# Altium PCB PC110.PcbDoc (part 7 of 24)
Units mm, origin at the board's own origin, x right, y up, seen from the top; angles counter-clockwise.
Board outline 150.05 x 107.35 mm, 10 copper layers (In2.Cu, F.Cu, B.Cu, In1.Cu, In3.Cu, In4.Cu, In5.Cu, In6.Cu, In7.Cu, In8.Cu); 936 components, 1434 nets, 4891 pads, 6088 vias.
Unrouted connection lines stored in the file: 2995.
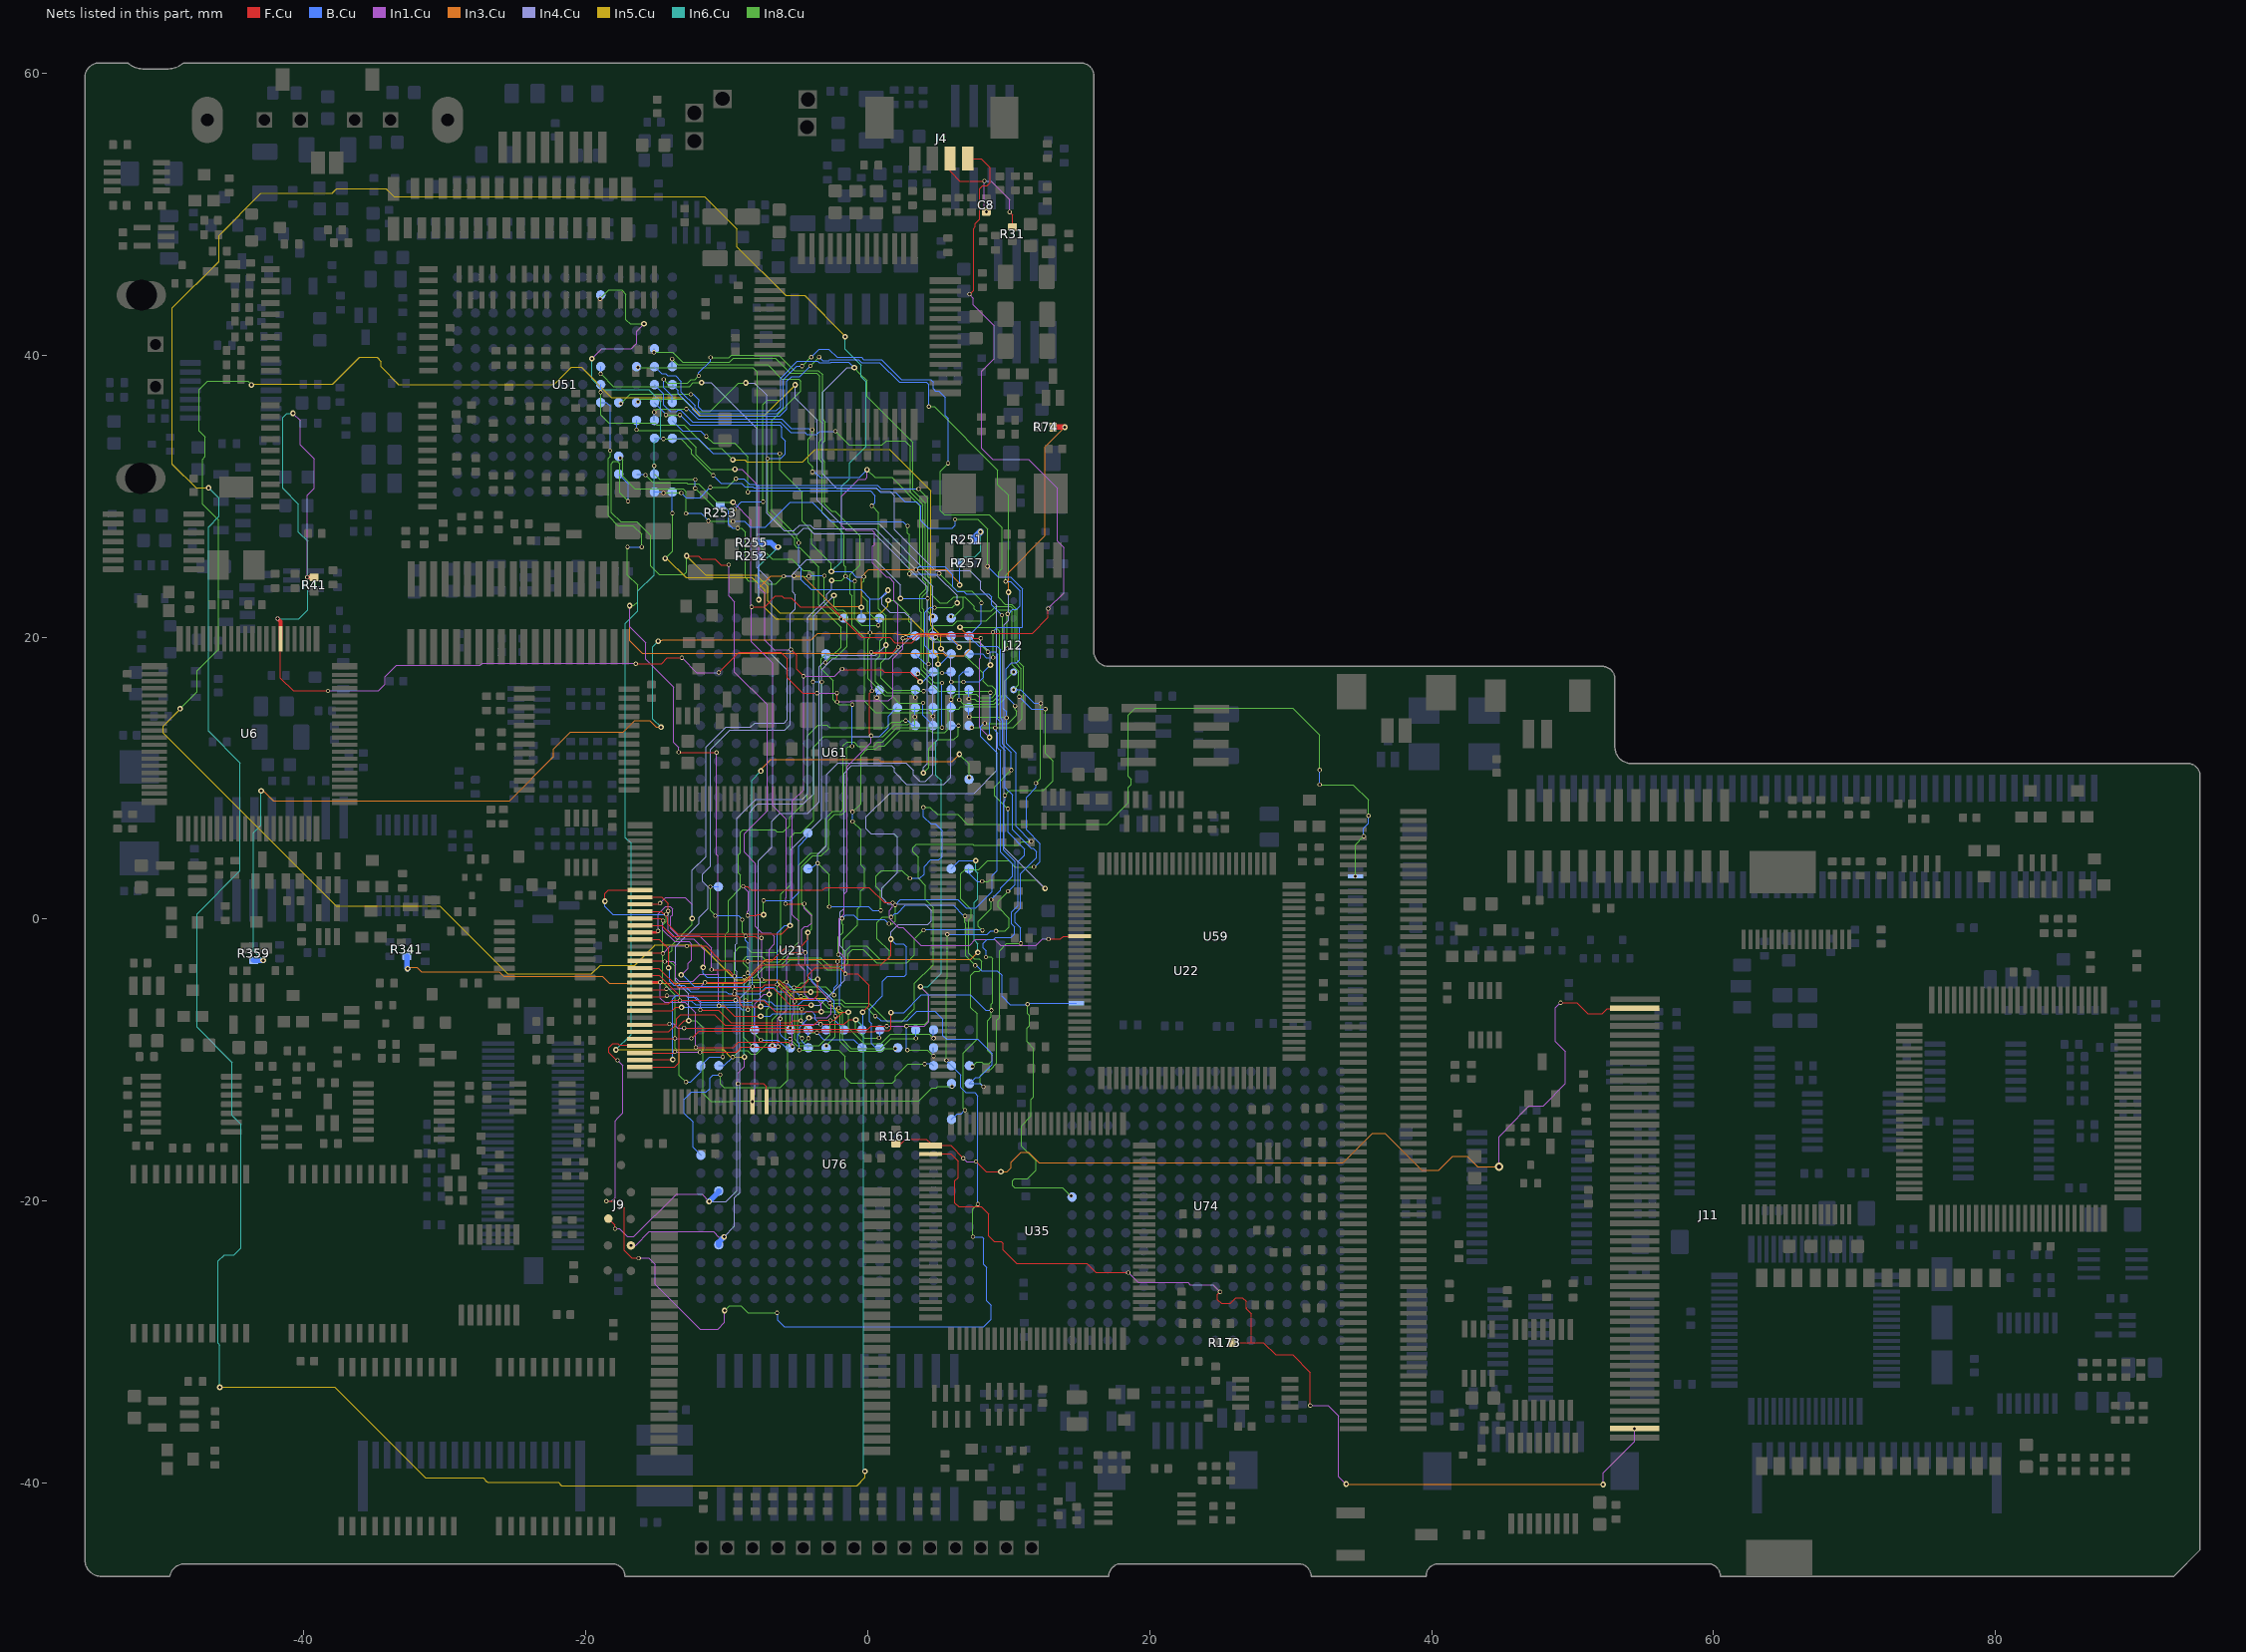
[diagram p14: the nets of this part, all layers, seen from the top]

## Via types
v1: diameter 0.3, hole 0.2, B.Cu to In8.Cu, tented both sides, 1934 vias
v2: diameter 0.4, hole 0.2, F.Cu to B.Cu, tented both sides, 1902 vias
v3: diameter 0.3, hole 0.2, F.Cu to In1.Cu, tented both sides, 1729 vias
v4: diameter 0.6, hole 0.3, F.Cu to B.Cu, tented both sides, 354 vias
v5: diameter 0.5, hole 0.3, F.Cu to B.Cu, tented both sides, 136 vias
v6: diameter 0.4, hole 0.2, B.Cu to In8.Cu, tented both sides, 12 vias
v7: diameter 0.3, hole 0.2, F.Cu to B.Cu, tented both sides, 6 vias
v8: diameter 0.6, hole 0.2, F.Cu to B.Cu, tented both sides, 4 vias
v9: diameter 0.5, hole 0.2, B.Cu to In8.Cu, tented both sides, 3 vias
v10: diameter 0.5, hole 0.2, F.Cu to B.Cu, tented both sides, 2 vias
v11: diameter 0.4, hole 0.3, F.Cu to B.Cu, tented both sides, 2 vias
v12: diameter 0.3, hole 0.2, F.Cu to In4.Cu, tented both sides, 2 vias
v13: diameter 0.6, hole 0.3, B.Cu to In8.Cu, tented both sides, 1 vias
v14: diameter 0.3, hole 0.2, F.Cu to In3.Cu, tented both sides, 1 vias

## Nets (pads, with @x,y where several pads share a name; then routed paths per layer and width w, separated by ;. In a path a pad name is that pad's centre, name@x,y a point inside that pad or via, vN(x,y) a via of type N, cw(c..) or ccw(c..) an arc to the next point about the centre after c; other vN are vias at no path point) (continued)
CF_CD1_Pluto: J11.2 R173.2 U35.27 | length 73.2
  F.Cu w0.08: U35.27@4.46,-16.65 5.89,-16.65 6.41,-17.17 6.41,-18.34 6.19,-18.56 6.19,-20.15 6.44,-20.4 8.06,-20.4 8.56,-20.9 8.56,-22.47 8.95,-22.86 9.46,-22.86 9.61,-23.01 9.61,-23.47 10.56,-24.42 15.55,-24.42 16.19,-25.06 v3(18.48,-25.06) ; v3(24.99,-26.43) 24.81,-26.61 24.81,-26.98 25.09,-27.26 25.72,-27.26 26.12,-26.86 26.59,-26.86 26.84,-27.11 26.84,-27.57 26.85,-27.58 26.85,-27.62 27.2,-27.97 27.2,-30.02 ; R173.2@25.83,-30.02 27.14,-30.02 28.05,-30.02 28.93,-30.9 30.13,-30.9 31.39,-32.16 v3(31.39,-34.49)
  In1.Cu w0.08: v3(18.48,-25.06) 19.19,-25.77 22.72,-25.77 22.87,-25.92 24.48,-25.92 v3(24.99,-26.43) ; v3(31.39,-34.49) 32.65,-34.49 33.41,-35.25 33.41,-39.53 v2(33.94,-40.06) ; v2(52.16,-40.09) 52.16,-39.28 54.39,-37.05 v3(54.39,-36.13)
  In3.Cu w0.08: v2(33.94,-40.06) 33.97,-40.09 v2(52.16,-40.09)
CF_CD2_Pluto: J11.49 R161.1 U35.26 | length 68.1
  F.Cu w0.08: R161.1@2,-15.92 2.36,-15.92 2.68,-15.6 4.15,-15.6 4.46,-15.91 U35.26@4.46,-16.05 5.88,-16.05 6.77,-16.94 v3(6.77,-16.95) ; v3(7.68,-17.19) 8.4,-17.91 v2(9.44,-17.91) ; v3(49.14,-5.92) 50.31,-5.92 51.09,-6.7 52.09,-6.7 52.46,-6.33 J11.49@54.39,-6.33
  In1.Cu w0.08: v3(6.77,-16.95) 7.01,-17.19 v3(7.68,-17.19) ; v4(44.79,-17.56) 44.79,-15.43 45.37,-14.85 45.37,-14.79 46.92,-13.24 47.92,-13.24 49.5,-11.66 49.5,-9.395 48.79,-8.685 48.79,-6.27 v3(49.14,-5.92)
  In3.Cu w0.08: v2(9.44,-17.91) 9.87,-17.91 10.16,-17.62 10.16,-17.23 10.87,-16.52 11.39,-16.52 12.15,-17.28 33.72,-17.28 35.8,-15.2 36.7,-15.2 39.3,-17.8 40.5,-17.8 41.48,-16.82 42.51,-16.82 43.25,-17.56 v4(44.79,-17.56)
Chipset_2XCPU_CLK: R359.2 U61.R2 | length 74.4
  In3.Cu w0.08: v2(-43.03,9.1) -42.87,9.1 -42.17,8.4 -25.41,8.4 -22.28,11.53 -22.28,12.07 -21.07,13.28 -17.34,13.28 -16.52,14.1 -15.47,14.1 -14.99,13.62 v2(-14.66,13.62) ; v2(-14.86,19.72) -14.81,19.77 -14.57,19.77 -14.53,19.81 -4,19.81 -3.54,20.27 1.99,20.27 2.06,20.2 5.67,20.2 6.48,19.39 v2(6.48,19.29)
  In6.Cu w0.08: v2(-43.03,9.1) -43.03,6.68 -43.58,6.13 -43.58,-2.23 v2(-42.88,-2.93) ; v2(-14.86,19.72) -15.25,19.33 -15.25,14.21 v2(-14.66,13.62)
  B.Cu w0.08: U61.R2@5.895,20.11 5.895,19.885 6.48,19.3 v2(6.48,19.29)
  B.Cu w0.4: R359.2@-43.55,-2.92 -42.89,-2.92 v2(-42.88,-2.93)
Chipset_32KHz: U21.51 U51.J2 U61.T10 | length 117.6
  F.Cu w0.08: v3(-9.2,-11.66) -7.39,-11.66 -7.18,-11.87 U21.51@-7.18,-12.94
  In1.Cu w0.08: v2(-19.56,39.76) -18.85,40.47 -16.76,40.47 -16.39,40.84 -16.39,41.71 v2(-15.87,42.23) ; v3(-9.2,-11.66) -9.2,-10.91 -8.75,-10.46 v2(-8.75,-9.77)
  In3.Cu w0.08: v2(-7.58,10.51) -7.58,10.62 -6.88,11.32 0.78,11.32 0.92,11.18 5.98,11.18 v2(6.5,11.7)
  In5.Cu w0.08: v2(-17.86,-9.26) -10.23,-9.26 -9.72,-9.77 v2(-8.75,-9.77)
  In6.Cu w0.08: v2(-19.56,39.76) -19.56,38.3 -18.83,37.57 -15.55,37.57 -14.7,36.72 -14.7,34.25 -15.15,33.8 -15.15,24.43 -16.31,23.27 -16.31,21.87 -17.19,20.99 -17.19,5.79 -16.79,5.39 -16.79,-8.173 -17.86,-9.243 v2(-17.86,-9.26) ; v2(-8.75,-9.77) -8.75,-9.56 -8.79,-9.52 -8.79,-4.61 -8.23,-4.05 -8.23,9.86 v2(-7.58,10.51)
  In8.Cu w0.08: v1(-18.99,44) -18.37,44.62 -17.45,44.62 -17.15,44.32 -17.15,42.52 -16.86,42.23 v2(-15.87,42.23) ; v2(6.5,11.7) 7.2,11 v1(7.2,10.05)
  B.Cu w0.08: v1(-18.99,44) -18.99,44.22 U51.J2@-18.94,44.27
Chipset_BIOS_CE#: U59.22 U61.G15 | length 70.8
  In8.Cu w0.08: v1(-3.55,3.98) -2.75,3.18 -2.75,0.91 v1(-2.73,0.89) ; v1(0.92,0.62) 0.92,1.98 0.58,2.32 0.58,3.07 0.96,3.45 2.44,3.45 v1(2.99,2.9) ; v1(3.95,7.93) 4.42,7.93 4.92,7.43 6.38,7.43 7.07,6.74 16.99,6.74 18.49,8.24 18.49,9.35 18.7,9.56 18.7,9.91 18.49,10.12 18.49,14.49 18.96,14.96 30.15,14.96 32.05,13.06 v1(32.05,10.58) ; v1(32.06,9.54) 34.44,9.54 35.52,8.46 v1(35.52,7.33) ; v1(34.59,3.04) 34.59,5.29 v1(35.18,5.88)
  B.Cu w0.08: U61.G15@-4.25,3.57 -4,3.57 -3.59,3.98 v1(-3.55,3.98) ; v1(-2.73,0.89) 0.07,0.89 0.34,0.62 v1(0.92,0.62) ; v1(2.99,2.9) 3.71,2.9 4,3.19 4,3.73 4.48,4.21 5.05,4.21 5.29,4.45 5.29,6.27 4.8,6.76 4.47,6.76 3.95,7.28 v1(3.95,7.93) ; v1(32.05,10.58) 32.05,9.55 v1(32.06,9.54) ; v1(35.18,5.88) 35.18,6.46 35.52,6.8 v1(35.52,7.33)
Chipset_CLK: R341.1 U61.R15 | length 51.5
  In3.Cu w0.08: v2(-32.64,-3.51) -32.55,-3.42 -31.96,-3.42 -31.66,-3.72 -26.15,-3.72 -25.83,-4.04 -18.83,-4.04 -18.34,-4.53 -8.9,-4.53 -7.22,-2.85 7.32,-2.85 v2(7.81,-2.36)
  In6.Cu w0.08: v2(7.66,4.15) 7.66,3.42 7.8,3.28 7.8,1.44 7.55,1.19 7.55,-1.48 7.81,-1.74 v2(7.81,-2.36)
  B.Cu w0.08: U61.R15@5.91,3.57 6.49,4.15 v2(7.66,4.15)
  B.Cu w0.4: R341.1@-32.69,-2.64 -32.69,-3.46 v2(-32.64,-3.51)
Chipset_CPU_CLK: R251.1 R252.1 R255.1 R257.2 U61.K1 | length 36
  In3.Cu w0.08: v2(-7.73,22.66) -7.73,23.51 -6.89,24.35 -4.61,24.35 -2.44,22.18 -0.52,22.18 v2(-0.46,22.12) -0.45,22.13 -0.45,24.28 0.06,24.79 5.55,24.79 6.52,23.82 v2(6.52,23.7)
  In6.Cu w0.08: v2(-7.73,22.66) -7.74,22.67 -7.74,25.02 v2(-6.36,26.4) ; v2(6.52,23.7) 6.52,25.31 6.89,25.68 7.57,25.68 8,26.11 v2(8,27.47)
  B.Cu w0.08: v2(-7.73,22.66) -7.71,22.68 R252.1@-7.71,25.75 ; v2(-0.46,22.12) -0.455,22.115 U61.K1@-0.455,21.38 ; v2(6.52,23.7) 6.53,23.71 R257.2@6.53,25.26 ; R251.1@7.55,26.92 R251.1@7.55,27.02
  B.Cu w0.4: R255.1@-7.71,26.72 -6.88,26.72 -6.56,26.4 v2(-6.36,26.4)
  B.Cu w0.5: R251.1@7.55,27.02 v2(8,27.47)
Chipset_CPU_CLK_Sense: R253.2 U61.J1 | length 16.2
  In8.Cu w0.08: v1(-9.22,27.74) -8.95,27.74 -8.68,27.47 -8.68,24.22 -8.45,23.99 -7.26,23.99 -7.05,23.78 -6.51,23.78 v1(-5.96,24.33) ; v1(-5.24,24.35) -5.21,24.32 v1(-4.18,24.32) ; v1(-3.08,24.36) -3.08,22.47 v1(-1.89,21.28)
  B.Cu w0.08: R253.2@-10.45,29.33 -10.23,29.33 -9.87,28.97 -9.87,28.01 -9.6,27.74 v1(-9.22,27.74) ; v1(-5.96,24.33) -5.26,24.33 v1(-5.24,24.35) ; v1(-4.18,24.32) -4.14,24.36 v1(-3.08,24.36) ; v1(-1.89,21.28) -1.825,21.28 U61.J1@-1.725,21.38
Chipset_FDC_TC: U22.33 U61.G13 | length 39
  F.Cu w0.08: v3(-8.84,2.33) -8.55,2.33 -8.27,2.05 -3.21,2.05 -3,2.26 0.1,2.26 1.19,1.17 v3(1.77,1.17) ; v3(-8.52,0.26) -7.89,0.26 -7.83,0.32 v2(-7.39,0.32) ; v3(12.82,-1.41) 13.68,-1.41 13.88,-1.21 U22.33@15.03,-1.21
  In1.Cu w0.08: v3(-8.84,2.33) -8.45,1.94 -8.45,0.63 -8.52,0.56 v3(-8.52,0.26) ; v3(1.77,1.17) 1.77,0.85 1.55,0.63 1.55,0.05 2.19,-0.59 2.5,-0.59 3.76,-1.85 7.23,-1.85 7.64,-1.44 8.99,-1.44 9.41,-1.86 11.93,-1.86 12.38,-1.41 v3(12.82,-1.41)
  In8.Cu w0.08: v2(-7.39,0.32) -7.39,1.31 v1(-7.38,1.32)
  B.Cu w0.08: v1(-7.38,1.32) -5.46,1.32 -4.9,1.88 -4.9,5.19 -4.25,5.84 U61.G13@-4.25,6.11
Chipset_SA16: U59.1 U61.B16 U74.J1 | length 62.8
  In8.Cu w0.08: v1(-11.16,2.3) -11.16,0.6 v1(-10.81,0.25) ; v1(-8.9,-0.03) -8.9,-0.94 v1(-8.66,-1.18) ; v1(-8.52,-2.99) -7.53,-2.99 -7.31,-3.21 -6.11,-3.21 -5.63,-2.73 -3.32,-2.73 -2.68,-3.37 -1.98,-3.37 -1.56,-2.95 -1.56,-2.26 -1.21,-1.91 -0.09,-1.91 0.86,-2.86 1.42,-2.86 1.54,-2.74 1.54,-2.26 0.66,-1.38 0.66,-0.23 1.04,0.15 v1(1.66,0.15) ; v1(6.89,0.23) 6.89,-0.23 6.95,-0.29 6.95,-2.61 v1(7.62,-3.28) ; v1(11.33,-6.03) 11.33,-6.7 11.46,-6.83 11.46,-7.55 11.29,-7.72 11.29,-8.68 11.77,-9.16 11.77,-12.6 11.6,-12.77 11.6,-13.94 10.9,-14.64 10.9,-16.11 11.92,-17.13 11.92,-17.82 11.32,-18.42 10.415,-18.42 10.28,-18.555 10.28,-18.9 10.41,-19.03 13.82,-19.03 v1(14.42,-19.63)
  B.Cu w0.08: v1(-11.16,2.3) U61.B16@-10.6,2.3 ; v1(-10.81,0.25) -9.18,0.25 v1(-8.9,-0.03) ; v1(-8.66,-1.18) -8.66,-1.5 -8.49,-1.67 -8.49,-2.96 v1(-8.52,-2.99) ; v1(1.66,0.15) 1.93,0.42 2.09,0.42 2.67,1 6.05,1 6.82,0.23 v1(6.89,0.23) ; v1(7.62,-3.28) 7.7,-3.28 8.08,-3.66 9.19,-3.66 9.52,-3.99 9.52,-5.47 10.1,-6.05 11.31,-6.05 v1(11.33,-6.03) 11.4,-5.96 U59.1@14.79,-5.96 ; U74.J1@14.49,-19.69 14.43,-19.63 v1(14.42,-19.63) 14.42,-19.635 U74.J1@14.495,-19.71
Chipset_Sound: R74.2 U61.T15 | length 42.8
  F.Cu w0.08: v2@13.97,34.91 v2(13.98,34.9)
  F.Cu w0.4: R74.2@13.14,34.91 v2@13.97,34.91
  In3.Cu w0.08: v2(9.98,23.19) 9.98,24.6 12.57,27.19 12.57,33.49 v2(13.98,34.9)
  In4.Cu w0.08: v2(9.98,23.19) 9.98,21.2 9.67,20.89 9.67,5.09 v2(12.58,2.18)
  In8.Cu w0.08: v1(8.12,2.68) 8.54,2.68 8.65,2.79 11.97,2.79 v2(12.58,2.18)
  B.Cu w0.08: U61.T15@7.18,3.57 7.18,3.27 7.77,2.68 v1(8.12,2.68)
CMOS_BATT+: C8.1 J4.3 R31.2 | length 10.2
  F.Cu w0.08: J4.3@5.84,53.95 5.84,53.04 6.52,52.36 v3(8.27,52.36) ; v3(10.06,50.16) 10.27,49.95 R31.2@10.27,49.1
  In1.Cu w0.08: v3(8.41,50.18) 8.27,50.32 v3(8.27,52.36) 8.74,52.36 10.06,51.04 v3(10.06,50.16)
CMOS_BATT_Sense: J4.4 R41.2 U6.6 | length 139.1
  F.Cu w0.08: U6.6@-41.65,19.88 -41.65,17.09 -40.76,16.2 v3(-38.28,16.2) ; R41.2@-39.29,24.25 R41.2@-39.27,24.23 ; v3(-16.46,18.12) -14.63,18.12 -14.21,18.54 v3(-13.18,18.54) ; v3(-10.57,17.5) -9.13,18.94 -6.18,18.94 -5.71,18.47 -5.71,17.13 -4.61,16.03 v3(-3.6,16.03) ; v3(-2.19,16.04) -2.17,16.02 v3(-2.17,15.42) ; v3(2.5,19.92) 3.14,19.92 3.51,20.29 11.7,20.29 12.8,21.39 v3(12.8,22.03) ; J4.4@7.09,53.95 8.05,53.95 8.69,53.31 8.69,52.24 8.48,52.03 8.15,52.03 7.94,51.82 7.94,49.65 7.64,49.35 7.64,49.13 7.5,48.99 7.5,44.61 v3(7.22,44.33)
  F.Cu w0.3: v7(-41.85,21.31) -41.65,21.11 U6.6@-41.65,19.88 ; v3(-39.75,24.25) R41.2@-39.29,24.25
  In1.Cu w0.08: v2(-40.77,35.88) -40.25,35.36 -40.25,33.63 -39.27,32.65 -39.27,30.56 -39.75,30.08 v3(-39.75,24.25) ; v3(-38.28,16.2) -34.71,16.2 -34.24,16.67 -34.24,17.21 -33.43,18.02 -27.48,18.02 -27.34,18.16 -16.5,18.16 v3(-16.46,18.12) ; v3(-13.18,18.54) -12.14,17.5 v3(-10.57,17.5) ; v3(-3.6,16.03) -2.2,16.03 v3(-2.19,16.04) ; v3(-2.17,15.42) -1.23,15.42 -1.16,15.49 1.48,15.49 1.79,15.8 1.79,18.46 2.5,19.17 v3(2.5,19.92) ; v3@7.22,44.32 7.49,44.05 7.49,43.56 8.975,42.075 8.975,39.765 8.09,38.88 8.09,33.38 8.85,32.62 11.4,32.62 13.46,30.56 13.46,26.81 13.91,26.36 13.91,26.03 13.915,26.025 13.915,23.155 v3@12.8,22.04
  In6.Cu w0.08: v7(-41.85,21.31) -40.34,21.31 -39.725,21.925 -39.725,26.8 -40.375,27.45 -40.375,29.425 -41.5,30.55 -41.5,35.57 -41.19,35.88 v2(-40.77,35.88)
CPU_A2: U21.10 U51.L6 U61.N7 U76.A3 | length 97.1
  F.Cu w0.08: v2(-18.64,1.27) -18.64,1.81 -18.39,2.06 U21.10@-16.153,2.06
  In8.Cu w0.08: v1(-16.3,39.13) -8.16,39.13 -7.83,38.8 -7.83,26.59 -6.77,25.53 -5.39,25.53 -4.58,24.72 -4.11,24.72 -3.85,24.46 -3.85,21.72 -3.88,21.69 -3.88,16.85 v1(-3.89,16.84) ; v1(-14.3,0.35) -14.3,-0.15 -14.55,-0.4 -14.55,-4.49 -13.65,-5.39 -13.65,-9.13 -13.37,-9.41 -13.37,-11.07 v1(-12.89,-11.55) ; v1(-10.28,-9.77) -10.28,-4.61 -10.09,-4.42 -10.09,-1.08 -9.88,-0.87 -9.88,1.34 -9.02,2.2 -9.02,3.13 -9.16,3.27 -9.16,4.57 -9.02,4.71 -9.02,6.18 -8.86,6.34 -6.58,6.34 -6.44,6.2 -5.98,6.2 -5.54,6.64 -5.54,7.22 -4.28,8.48 -4.28,13.01 -3.52,13.77 -3.27,13.77 ; v1(-3.26,16.83) -3.26,13.78 -3.27,13.77 ; v1(2.69,14.09) 2.46,14.09 2.44,14.09 2.36,14.01 2.35,14 1.84,14 1.71,14 1.54,13.83 1.29,13.58 0.95,13.58 -2.7,13.58 -2.83,13.71 -2.89,13.77 -3.27,13.77
  B.Cu w0.08: v2(-18.64,1.27) -18.64,0.9 -18.09,0.35 v1(-14.3,0.35) ; U51.L6@-16.4,39.19 -16.34,39.13 v1(-16.3,39.13) ; v1(-12.89,-11.55) -12.58,-11.55 -11.84,-10.81 U76.A3@-11.84,-10.39 -11.22,-9.77 v1(-10.28,-9.77) ; v1(-3.89,16.84) -3.27,16.84 v1(-3.26,16.83) ; v1(2.69,14.09) 2.84,14.09 3.17,13.76 U61.N7@3.355,13.76
CPU_A3: U21.11 U51.M6 U61.T7 U76.D2 | length 113.2
  F.Cu w0.08: U21.11@-16.153,1.562 -14.612,1.562 -14.16,1.11 v3(-14.16,0.58)
  In1.Cu w0.08: v3(-14.16,0.58) -14.16,-0.79 -13.54,-1.41 -12.37,-1.41 -11.57,-2.21 -11.57,-3.32 v2(-11.67,-3.42)
  In8.Cu w0.08: v1(-8.17,-9.01) -8.81,-8.37 -8.81,-6.17 -8.76,-6.12 v1(-8.76,-4.12) -8.03,-4.12 -7.3,-3.39 -5.98,-3.39 -5.49,-2.9 -3.58,-2.9 -2.88,-3.6 -1.88,-3.6 -1.38,-3.1 -1.38,-2.45 -1.06,-2.13 -0.34,-2.13 0.61,-3.08 2.78,-3.08 3.32,-2.54 3.32,-1.41 v1(3.96,-0.77) ; v1(-4.66,39.23) -4.03,39.86 v1(-4.01,39.86) ; v1(5.7,32.34) 5.14,31.78 5.14,28.96 5.42,28.68 8.6,28.68 9.52,27.76 9.52,24.88 9.27,24.63 9.27,22.81 9.74,22.34 10.22,22.34 10.61,21.95 10.61,18.35 11.05,17.91 11.05,15.43 10.96,15.34 10.96,14.22 10.32,13.58 v1(9.04,13.58) 9.03,13.59 v1(7.37,13.59) ; v1(8.13,-0.79) 7.85,-0.51 7.85,-0.15 8.75,0.75 v1(8.75,1.38)
  B.Cu w0.08: U51.M6@-15.13,39.19 -14.62,38.68 -14.32,38.68 -14.18,38.54 -13.64,38.54 -13.22,38.12 -13.22,37.4 -12.26,36.44 -12.26,36.25 -11.88,35.87 -6.41,35.87 -5.98,36.3 -5.98,38.27 -5.02,39.23 v1(-4.66,39.23) ; v2(-11.67,-3.42) -11.67,-3.85 -11.4,-4.12 v1(-8.76,-4.12) ; v1(-8.17,-9.01) -8.14,-9.01 U76.D2@-8.03,-9.12 ; v1(-4.01,39.86) -3.43,40.44 -2.765,40.44 -2.185,39.86 -0.45,39.86 -0.29,39.7 0.96,39.7 2.39,38.27 4.48,38.27 4.64,38.11 4.64,37.62 4.8,37.46 5.05,37.46 5.5,37.01 5.5,35.73 5.7,35.53 v1(5.7,32.34) ; v1(3.96,-0.77) 4.01,-0.72 8.06,-0.72 v1(8.13,-0.79) ; v1(8.75,1.38) 9.43,2.06 9.43,2.22 10.27,3.06 10.27,3.911 9.42,4.761 9.42,11.95 9.21,12.16 9.21,13.2 9.04,13.37 v1(9.04,13.58)
CPU_A4: U21.12 U51.J6 U61.R7 U76.D1 | length 106
  F.Cu w0.08: U21.12@-16.153,1.06 -14.81,1.06 v3(-14.73,1.14)
  In1.Cu w0.08: v3(-14.73,1.14) -14.34,1.53 -12.94,1.53 -12.45,1.04 v2(-12.45,0.05)
  In4.Cu w0.08: v2(-12.45,0.05) -12.45,3.47 -11.48,4.44 -11.48,12.21 -10.06,13.63 -8.31,13.63 -8.02,13.92 -5.93,13.92 -5.7,14.15 -5.7,17.65 -6.79,18.74 -6.79,23.89 -7.86,24.96 -7.86,27.31 ; v2(-11.79,38.06) -11.1,38.06 -7.86,34.82 -7.86,27.31 ; v2(3.95,10.37) 3.95,10.77 4.24,11.06 4.24,23.58 0.47,27.35 -3.85,27.35 -4.225,27.725 -4.535,27.725 -4.95,27.31 -7.86,27.31
  In8.Cu w0.08: v1(-18.94,38.69) -18.04,37.79 -12.65,37.79 -12.38,38.06 v2(-11.79,38.06) ; v1(-13.33,-5.77) -13.33,-4.93 -13.67,-4.59 -13.67,-3.35 -14.08,-2.94 -14.08,-2.4 -13.88,-2.2 -13.88,-1.81 -12.45,-0.38 v2(-12.45,0.05) ; v2(3.95,10.37) 4.35,10.77 4.35,12.11 4.97,12.73 6.12,12.73 6.43,13.04 v1(6.43,13.73)
  B.Cu w0.08: v1(-18.94,38.69) U51.J6@-18.94,39.19 ; v1(-13.33,-5.77) -12.52,-5.77 -12.22,-6.07 -8.26,-6.07 -8.03,-6.3 U76.D1@-8.03,-7.85 ; U61.R7@5.91,13.73 v1(6.43,13.73)
CPU_A5: U21.13 U51.N6 U61.P7 U76.E2 | length 97.9
  F.Cu w0.08: U21.13@-16.153,0.56 -14.65,0.56 -14.18,0.09 -14.18,-0.35 -13.5,-1.03 -6.09,-1.03 v2(-5.51,-0.45)
  In4.Cu w0.08: v2(-5.51,-0.45) -5.45,-0.39 -5.45,4.94 -3.28,7.11 -3.28,17.69 -2.495,18.475 1.235,18.475 1.24,18.47 1.51,18.47 3.09,20.05 3.09,21.29 2.61,21.77 1.56,21.77 1.02,22.31 1.02,22.81 1.43,23.22 v2(1.43,23.33)
  In8.Cu w0.08: v1(-13.87,39.73) -13.47,39.33 -7.09,39.33 -6.08,38.32 -4.91,38.32 -4.74,38.15 -4.74,37.46 -6.81,35.39 -6.81,28.98 -5.02,27.19 -5.02,27.03 -4.89,26.9 v1(-4.89,26.69) ; v1(-6.77,-8.96) -6.77,-7.12 -6.42,-6.77 v1(-6.42,-4.64) ; v1(0.16,20.32) 0.16,20.01 0.01,19.86 0.01,17.05 1.22,15.84 1.71,15.84 2.21,15.34 v1(3.92,15.34)
  B.Cu w0.08: v1(-13.87,39.73) -13.86,39.72 U51.N6@-13.86,39.19 ; v1(-6.77,-8.96) -6.77,-9.11 U76.E2@-6.76,-9.12 ; v1(-6.42,-4.64) -6.42,-0.97 -5.9,-0.45 v2(-5.51,-0.45) ; v1(-4.89,26.69) -4.89,25.05 -4.72,24.88 -4.72,24.07 -4.02,23.37 -0.48,23.37 0.17,22.72 ; v1(0.16,20.32) 0.16,22.71 0.17,22.72 ; v2(1.43,23.33) 0.82,22.72 0.17,22.72 ; v1(3.92,15.34) 3.92,14.465 U61.P7@4.625,13.76
CPU_A6: U21.14 U51.M7 U61.N6 U76.F2 | length 93.7
  F.Cu w0.08: U21.14@-16.153,0.06 -14.7,0.06 v3(-14.53,-0.11)
  In1.Cu w0.08: v3(-14.53,-0.11) -14.53,-0.76 -13.7,-1.59 -12.67,-1.59 -12.49,-1.77 -12.49,-2.89 -12.73,-3.13 -12.74,-3.13 -12.74,-3.49 -13.2,-3.95 v2(-13.24,-3.95)
  In8.Cu w0.08: v1(-8.51,-3.81) -8.51,-3.45 -8.82,-3.14 -8.82,-2.87 -8.6,-2.65 -7.52,-2.65 -7.15,-3.02 -6.28,-3.02 -4.88,-1.62 -4.88,3.85 -4.05,4.68 -3.46,4.68 -2.99,5.15 -2.99,7.15 -2.48,7.66 -1.89,7.66 -1.73,7.82 -1.73,12.31 -1.48,12.56 -0.97,12.56 -0.67,12.26 0.4,12.26 0.71,12.57 1.04,12.57 2.06,13.59 3.36,13.59 ; v1(-8.18,-4.77) -8.18,-7.96 v1(-7.58,-8.56) ; v1(-2.29,34.61) -1.31,33.63 1.02,33.63 1.33,33.94 2.63,33.94 3.02,33.55 3.02,30.29 3.91,29.4 3.91,24.07 4.12,23.86 4.12,23.42 3.69,22.99 3.69,21.82 3.8,21.71 3.8,17.69 4.73,16.76 v1(5.27,16.76) ; v1(3.35,14.36) 3.36,14.35 3.36,13.59 ; v1(5.27,13.59) 3.36,13.59
  B.Cu w0.08: U51.M7@-15.13,37.92 -14.46,37.25 -14.46,36.48 -13.99,36.01 -13.57,36.01 -13.45,36.13 -13.27,36.13 -12.41,35.27 -6.2,35.27 -5.46,34.53 -4.45,34.53 -4.31,34.39 -3.61,34.39 -3.4,34.6 -2.3,34.6 v1(-2.29,34.61) ; v2(-13.24,-3.95) -13.13,-3.95 -12.31,-4.77 v1(-8.18,-4.77) -8.18,-4.14 v1(-8.51,-3.81) ; v1(-7.58,-8.56) -6.37,-8.56 -5.81,-9.12 U76.F2@-5.49,-9.12 ; v1(3.35,14.36) 3.355,14.365 U61.N6@3.355,15.03 ; v1(5.27,13.59) v1(5.27,16.76)
CPU_A7: U21.15 U51.N7 U61.T6 U76.F1 | length 113
  F.Cu w0.08: U21.15@-16.153,-0.44 -14.61,-0.44 -13.83,-1.22 -7.97,-1.22 -7.86,-1.33 v3(-7.54,-1.33) ; v3(-7.51,-4.28) -6.29,-4.28 -5.41,-5.16 v2(-4.05,-5.16)
  In1.Cu w0.08: v3(-7.54,-1.33) -7.51,-1.36 v3(-7.51,-4.28)
  In8.Cu w0.08: v1(-5.5,-7.7) -5.5,-5.41 -5.25,-5.16 v2(-4.05,-5.16) -3.06,-5.16 -2.51,-5.71 -1.86,-5.71 -1.61,-5.96 0.08,-5.96 1.39,-7.27 2.41,-7.27 3.32,-6.36 3.32,-4.55 4.65,-3.22 4.65,0.82 4.09,1.38 4.09,2.39 3.58,2.9 3.58,4.4 3.2,4.78 3.2,5.08 3.44,5.32 7.44,5.32 7.52,5.24 7.56,5.24 7.95,5.24 10.67,5.24 10.85,5.42 10.94,5.51 v1(11.59,5.51) ; v1(-4.07,39.24) -3.45,39.86 v1(-3.45,39.87) ; v1(4.34,36.36) 4.71,36.36 9.23,31.84 9.23,30.82 9.99,30.06 9.99,24.59 9.78,24.38 v1(9.78,23.95) ; v1(7.2,14.35) 9.78,14.35 v1(9.85,14.28) ; v1(9.9,19.19) 9.9,21.64 v1(9.92,21.66)
  B.Cu w0.08: U51.N7@-13.86,37.92 -13.44,37.5 -13.44,37.27 -12.43,36.26 -12.43,36.15 -11.96,35.68 -6.23,35.68 -5.73,36.18 -5.73,38.15 -5.39,38.49 -4.82,38.49 v1(-4.07,39.24) ; v1(-3.45,39.87) -3.21,39.63 -2.75,39.63 -2.69,39.69 -0.64,39.69 -0.44,39.49 0.85,39.49 2.26,38.08 4.17,38.08 4.34,37.91 v1(4.34,36.36) ; U61.T6@7.18,15 7.18,14.37 v1(7.2,14.35) ; v1(9.78,23.95) 10.12,23.95 10.79,23.28 10.79,22.23 10.54,21.98 10.34,21.98 10.33,21.97 10.29,21.97 9.98,21.66 v1(9.92,21.66) ; v1(9.9,19.19) 9.62,18.91 9.62,14.94 9.85,14.71 v1(9.85,14.28) 9.85,12.45 10.52,11.78 10.52,6.58 v1(11.59,5.51)
CPU_A8: U21.16 U51.J7 U61.R6 U76.G2 | length 109.3
  F.Cu w0.08: v3(-11.08,-3.57) -11.05,-3.6 -9.89,-3.6 v3(-9.45,-4.04) ; v3(-9.43,-5.11) -9.41,-5.09 -7.36,-5.09 -7.18,-4.91 -6.68,-4.91 -5.5,-6.09 v2(-4.02,-6.09)
  F.Cu w0.2: U21.16@-16.153,-0.94 -14.98,-0.94 v3(-14.87,-0.83)
  In1.Cu w0.08: v3(-14.87,-0.83) -14.87,0.38 -14.35,0.9 -14.03,0.9 -13.85,0.72 -13.85,0.31 -13.98,0.18 -13.98,-0.67 -13.46,-1.19 -11.92,-1.19 -11.08,-2.03 v3(-11.08,-3.57) ; v3(-9.45,-4.04) -9.43,-4.06 v3(-9.43,-5.11)
  In4.Cu w0.08: v2(-4.02,-6.09) -3.41,-6.09 -1.64,-4.32 -1.64,-2.23 -1.96,-1.91 -1.96,0.5 -1.69,0.77 -1.69,10.33 -1.13,10.89 1.7,10.89 1.88,10.71 1.88,10.45 2.75,9.58 5.41,9.58 5.88,10.05 5.88,18.51 v2(5.2,19.19)
  In5.Cu w0.08: v2(-9.57,32.59) -8.72,32.59 -8.57,32.44 -4.61,32.44 -3.73,33.32 1.55,33.32 4.48,30.39 4.48,20.85 5.2,20.13 v2(5.2,19.19)
  In8.Cu w0.08: v1(-18.94,37.38) -18.94,35.75 -18.38,35.19 -15.09,35.19 -14.96,35.06 -13.01,35.06 -11.35,33.4 -10.38,33.4 v2(-9.57,32.59) ; v1(-4.66,-8.44) -4.67,-8.44 -4.96,-8.15 -4.96,-6.2 -4.85,-6.09 v2(-4.02,-6.09) ; v2(5.2,19.19) 5.69,18.7 6.92,18.7 8.18,17.44 8.18,16.88 8.5,16.56 8.79,16.56 9.08,16.27 9.08,15.99 8.81,15.72 7.94,15.72 7.71,15.95 6.29,15.95 v1(5.91,15.57)
  B.Cu w0.08: v1(-18.94,37.38) U51.J7@-18.94,37.92 ; v1(-4.66,-8.44) -4.66,-8.68 U76.G2@-4.22,-9.12 ; U61.R6@5.895,15.03 5.895,15.555 v1(5.91,15.57)
CPU_A9: U21.17 U51.N8 U61.P6 U76.G1 | length 95.6
  F.Cu w0.08: U21.17@-16.153,-1.44 -14.79,-1.44 -14.13,-2.1 v2(-14.13,-3.45)
  In8.Cu w0.08: v1(-14.47,38.29) -14.48,38.28 -14.24,38.04 -12.78,38.04 -12.54,38.28 -12.25,38.28 v1(-11.99,38.54) ; v1(-11.15,39.84) -9.83,39.84 -9.66,40.01 -6.32,40.01 -5.22,38.91 -3.5,38.91 -3.2,38.61 -3.2,35.47 -3.01,35.28 -3.01,33.96 -3.28,33.69 -3.28,32.69 -3.04,32.45 -3.04,29.43 -2.55,28.94 -2.32,28.94 -0.56,27.18 -0.56,25.13 -1.24,24.45 -1.24,23.06 -1.11,22.93 -1.11,20.83 -0.24,19.96 -0.24,15.46 0.56,14.66 4.355,14.66 v1(4.625,14.39) ; v1(-9.47,-5.3) -9.46,-5.29 -9.46,-2.35 -9.09,-1.98 -8.61,-1.98 -8.25,-2.34 -6.44,-2.34 -6.15,-2.05 -6.15,1.78 -5.5,2.43 -5.5,5.81 -5.18,6.13 -4.73,6.13 -3.85,7.01 -3.85,12.22 -3.12,12.95 1.08,12.95 1.93,13.8 2.86,13.8 3.02,13.96 3.02,14.66 ; v1(-5.18,-5.84) -5.18,-8.5 -4.93,-8.75 -4.51,-8.75 v1(-4.2,-8.44)
  B.Cu w0.08: v1(-14.47,38.29) -14.47,37.71 -13.86,37.1 U51.N8@-13.86,36.65 ; v2(-14.13,-3.45) -14.05,-3.53 -14.05,-4.41 -13.78,-4.68 -13.02,-4.68 -12.55,-5.15 -10.04,-5.15 -9.89,-5.3 v1(-9.47,-5.3) -7.7,-5.3 -7.23,-4.83 -6.68,-4.83 -6.38,-5.13 -5.89,-5.13 v1(-5.18,-5.84) ; v1(-11.99,38.54) -11.99,38.75 -11.15,39.59 v1(-11.15,39.84) ; U76.G1@-4.22,-7.85 -4.22,-8.42 v1(-4.2,-8.44) ; v1(4.625,14.39) U61.P6@4.625,15.03
CPU_A10: U21.19 U51.M8 U61.M6 U76.H2 | length 81.8
  F.Cu w0.08: U21.19@-16.153,-2.401 -14.549,-2.401 v3(-14.52,-2.43) ; v3(-12.826,-1.908) -11.472,-1.908 -10.43,-2.95 -6.79,-2.95 -5.79,-1.95 -4.75,-1.95 -4.25,-1.45 v2(-4.25,-0.95)
  In1.Cu w0.08: v3(-14.52,-2.43) -13.998,-1.908 v3(-12.826,-1.908)
  In8.Cu w0.08: v1(-14.32,35.77) v1(-13.32,35.77) ; v1(-7.1,32.67) -7.1,28.91 -5.19,27 -5.19,26.52 -5.02,26.35 -4.83,26.35 -3.47,24.99 -3.47,22.28 -1.9,20.71 -1.9,19.3 -2.46,18.74 -3.02,18.74 -3.29,18.47 -3.29,17.78 -2.44,16.93 -2.44,15.59 -2.07,15.22 v1(-1.09,15.22) ; v2(-4.25,-0.95) -3.99,-0.69 -3.99,0.35 -4.68,1.04 -4.68,3.73 -3.92,4.49 -3.29,4.49 -2.77,5.01 -2.77,7 -2.34,7.43 -1.8,7.43 -1.49,7.74 -1.49,12.13 -1.36,12.26 v1(-1.11,12.26) ; v1(-2.94,-8.97) -2.3,-8.33 v1(-2.3,-6.87)
  B.Cu w0.08: U51.M8@-15.13,36.65 -14.32,35.84 v1(-14.32,35.77) ; v1(-13.32,35.77) -12.59,35.04 -6.25,35.04 -6.1,34.89 -6.1,34.17 -5.84,33.91 -5.84,33 -6.17,32.67 v1(-7.1,32.67) ; v2(-4.25,-0.95) -4.27,-0.97 -4.27,-4.06 -3.62,-4.71 -3.5,-4.71 -2.38,-5.83 -2.38,-6.43 -2.3,-6.51 v1(-2.3,-6.87) ; U76.H2@-2.95,-9.12 -2.94,-9.11 v1(-2.94,-8.97) ; v1(-1.11,12.26) -1.12,12.27 -1.12,13 ; v1(-1.09,15.22) -1.12,15.19 -1.12,13 ; U61.M6@2.085,15.03 1.46,14.405 1.46,13.59 0.83,12.96 -1.12,12.96 -1.12,13
CPU_A11: U21.20 U51.J8 U61.T5 U76.H1 | length 106.3
  F.Cu w0.08: U21.20@-16.153,-2.959 -14.451,-2.959 v3(-14.41,-3) ; v3(-13.41,11.84) -10.74,11.84 v3(-10.73,11.83) ; v3(-10.55,-6.13) -10.21,-6.13 -9.46,-6.88 v2(-7.6,-6.88)
  In1.Cu w0.08: v2(-16.89,22.24) -16.89,20.74 -15.75,19.6 -15.75,18.43 -13.78,16.46 -13.78,12.55 -13.41,12.18 v3(-13.41,11.84) ; v3(-14.41,-3) -13.82,-3 -13.63,-3.19 -13.63,-4.17 -13.38,-4.42 -12.4,-4.42 -11.89,-3.91 -10.58,-3.91 ; v3(-10.73,11.83) -10.73,4.58 -10.61,4.46 -10.61,-3.88 -10.58,-3.91 ; v3(-10.55,-6.13) -10.58,-6.1 -10.58,-3.91
  In3.Cu w0.08: v2(-16.89,22.24) -16.89,19.75 -16,18.86 5.36,18.86 5.52,18.7 6.81,18.7 7.26,19.15 7.26,19.99 v2(6.54,20.71)
  In8.Cu w0.08: v1(-18.27,33.23) -18.27,32.81 -18.41,32.67 -18.41,28.62 -17.71,27.92 -16.65,27.92 -16.03,27.3 v1(-16.03,26.4) ; v1(-17.04,26.4) -17.04,24.43 -16.32,23.71 -16.32,22.5 -16.58,22.24 v2(-16.89,22.24) ; v2(6.54,20.71) 9.06,20.71 9.34,20.43 9.34,15.91 8.89,15.46 7.74,15.46 7.58,15.62 v1(7.17,15.62)
  B.Cu w0.08: U51.J8@-18.94,36.65 -18.53,36.65 -18.27,36.39 v1(-18.27,33.23) ; v1(-17.04,26.4) v1(-16.03,26.4) ; v2(-7.6,-6.88) -6.91,-6.88 -6.72,-6.69 -4.52,-6.69 -4.34,-6.51 -3.99,-6.51 -3.71,-6.79 -3.71,-7.09 U76.H1@-2.95,-7.85 ; U61.T5@7.165,16.3 7.165,15.625 v1(7.17,15.62)
CPU_A12: U21.21 U51.L8 U61.R5 U76.J1 | length 107.2
  F.Cu w0.08: U21.21@-16.153,-3.467 -14.813,-3.467 -13.46,-4.82 -7.47,-4.82 -7.3,-4.65 -6.41,-4.65 -5.39,-5.67 -3.83,-5.67 -3.55,-5.39 v2(-3.55,-4.25)
  In4.Cu w0.08: v2(-8.65,38.04) -8.03,38.04 -7.16,37.17 -7.16,28.8 -5.93,27.57 -5.21,27.57 -5.21,27.58 -4.84,27.95 -4.09,27.95 -3.84,27.7 0.51,27.7 4.62,23.59 4.62,19.67 ; v2(-3.55,-4.25) -3.55,4.62 -2.91,5.26 -2.91,10.26 -2.09,11.08 2.7,11.08 3.23,10.55 3.23,10.24 3.7,9.77 4.08,9.77 4.62,10.31 4.62,19.67 ; v2(8.7,18.03) 8.7,18.89 7.92,19.67 4.62,19.67
  In8.Cu w0.08: v1(-16.3,36.7) -16.11,36.89 -13.09,36.89 -12.22,36.02 -11.19,36.02 -9.17,38.04 v2(-8.65,38.04) ; v1(-6.2,-7.05) -6.2,-6.58 -6.12,-6.5 -6.12,-5.02 -5.89,-4.79 -4.99,-4.79 -4.7,-4.5 -4.48,-4.5 -4.23,-4.25 v2(-3.55,-4.25) ; v1(-5.51,-8.51) -5.05,-8.97 -3.45,-8.97 -2.65,-8.17 v1(-2.65,-7.17) ; v1(5.92,16.83) v1(6.79,16.83)
  B.Cu w0.08: U51.L8@-16.44,36.59 -16.4,36.63 U51.L8@-16.4,36.65 -16.35,36.7 v1(-16.3,36.7) ; v1(-6.2,-7.05) -6.2,-8.16 -6.15,-8.21 -6.15,-8.22 -5.86,-8.51 v1(-5.51,-8.51) ; v1(-2.65,-7.17) -2.36,-7.17 U76.J1@-1.68,-7.85 ; U61.R5@5.915,16.275 5.915,16.825 v1(5.92,16.83) ; v1(6.79,16.83) 7.89,16.83 8.24,17.18 8.24,17.57 v2(8.7,18.03)
CPU_A13: U21.22 U51.N9 U61.P5 U76.K2 | length 87
  F.Cu w0.08: U21.22@-16.153,-3.975 -14.795,-3.975 -13.33,-5.44 -9.25,-5.44 -9.07,-5.62 -9.07,-5.96 -8.84,-6.19 v2(-7.6,-6.19)
  In4.Cu w0.08: v2(-7.6,-6.19) -7.6,-4.29 -7.76,-4.13 -7.76,4.16 -6.81,5.11 -6.81,6.94 -6.24,7.51 -4.27,7.51 -3.45,8.33 -3.45,17.89 -2.63,18.71 0.56,18.71 v2(1.29,19.44)
  In8.Cu w0.08: v1(-11.46,34.25) -10.98,33.77 -9.47,33.77 -8.5,32.8 v1(-8.5,30.29) ; v1(-4.68,-6.37) -4.68,-7.39 -4.03,-8.04 v1(-3.6,-8.04) ; v1(0.29,29.32) 0.78,28.83 0.78,22.01 1.29,21.5 v2(1.29,19.44) 1.29,18.54 0.93,18.18 0.93,17.1 1.78,16.25 3.49,16.25 3.56,16.18 v1(3.97,16.18)
  B.Cu w0.08: U51.N9@-13.86,35.38 -13.12,34.64 -11.85,34.64 v1(-11.46,34.25) ; v1(-8.5,30.29) -8.42,30.37 0.2,30.37 0.52,30.05 0.52,29.53 0.31,29.32 v1(0.29,29.32) ; v2(-7.6,-6.19) -7.59,-6.18 -6.97,-6.18 -6.81,-6.34 -4.71,-6.34 v1(-4.68,-6.37) ; v1(-3.6,-8.04) -3.11,-8.53 -1,-8.53 U76.K2@-0.41,-9.12 ; v1(3.97,16.18) 4.06,16.27 U61.P5@4.64,16.27
CPU_A14: U21.23 U51.M9 U61.T4 U76.K1 | length 121.7
  F.Cu w0.08: v3(-12.19,-9.09) -9.54,-9.09 -9.18,-8.73 -5.65,-8.73 v3(-5.34,-9.04) ; v3(-5.23,-4.84) -4.68,-4.84 -4.22,-4.38 -4.22,-3.93 -3.73,-3.44 -2,-3.44 -1.59,-3.85 v3(-1.59,-3.88) -0.72,-3.88 0.09,-4.69 0.09,-6.15 v2(-0.36,-6.6) ; v3(0.24,13.02) 0.14,13.12 0.14,16.03 v3(0.3,16.19) ; v3(0.25,18.94) 1.79,18.94 v3(2.16,19.31)
  F.Cu w0.2: U21.23@-16.18,-4.483 -16.167,-4.47 v3(-14.72,-4.47)
  In1.Cu w0.08: v3(-14.72,-4.47) -14.72,-5.59 -14.42,-5.89 -12.97,-5.89 -12.22,-6.64 -12.22,-9.06 v3(-12.19,-9.09) ; v3(-5.34,-9.04) -5.36,-9.02 -5.36,-6.79 -5.23,-6.66 v3(-5.23,-4.84) ; v3(-1.59,-3.88) -1.59,-2.76 -2.02,-2.33 -2.02,0.04 -1.68,0.38 -1.68,1.79 -1.48,1.99 -1.48,10.83 0.24,12.55 v3(0.24,13.02) ; v2(-0.05,31.88) -0.05,31.33 -0.17,31.21 -0.64,31.21 -1.85,30 -1.85,27.91 -1.54,27.6 0.31,27.6 0.48,27.43 0.48,26.58 0.35,26.45 0.35,25.26 1.34,24.27 1.49,24.27 1.87,23.89 1.87,22.57 2.16,22.28 v3(2.16,19.31) ; v3(0.25,18.94) 0.26,18.93 0.26,16.49 0.3,16.45 v3(0.3,16.19)
  In8.Cu w0.08: v1(-15.15,35.95) -14.92,36.18 v1(-12.86,36.18) ; v1(-3.94,34.72) -3.94,34.35 -4.23,34.06 -4.23,32.39 -3.92,32.08 v1(-3.92,31.73) ; v2(-0.05,31.88) 0.5,31.33 1.71,31.33 3.7,29.34 3.7,25.06 v1(3.42,24.78) ; v1(6.49,15.56) 6.78,15.27 8.96,15.27 9.55,15.86 9.55,21.53 v1(9.51,21.57)
  B.Cu w0.08: v1(-15.15,35.95) -15.13,35.93 U51.M9@-15.13,35.38 ; v1(-12.86,36.18) -12.73,36.18 -12.04,35.49 -6.1,35.49 -5.42,34.81 -4.19,34.81 -4.1,34.72 v1(-3.94,34.72) ; v1(-3.92,31.73) -3.78,31.73 -3.39,31.34 -0.59,31.34 v2(-0.05,31.88) ; U76.K1@-0.41,-7.85 -0.32,-7.76 -0.32,-6.64 v2(-0.36,-6.6) ; v1(3.42,24.78) 3.64,25 5.47,25 6.04,24.43 6.04,23.58 6.36,23.26 6.81,23.26 7,23.07 8.58,23.07 8.8,22.85 8.8,22.28 v1(9.51,21.57) ; v1(6.49,15.56) 6.49,17.27 6.79,17.57 U61.T4@7.165,17.57
CPU_A15: U21.24 U51.K8 U61.R4 U76.L2 | length 146.8
  F.Cu w0.08: U21.24@-16.18,-4.99 -14.34,-4.99 v3(-14.28,-4.93) ; v3(-11.54,-4.48) -8.68,-4.48 -7.45,-3.25 0.94,-3.25 1.64,-2.55 v2(1.64,-1.41)
  In1.Cu w0.08: v3(-14.28,-4.93) -11.99,-4.93 v3(-11.54,-4.48)
  In4.Cu w0.08: v2(-0.95,39.12) -1.48,39.12 -3.21,37.39 -3.21,31.58 -2.2,30.57 0.64,30.57 0.87,30.34 1.57,30.34 1.88,30.03 1.88,27.64 4.8,24.72 7.22,24.72 8,23.94 8,23.4 9.16,22.24 9.16,10.54 7.56,8.94 1.56,8.94 -0.12,7.26 -0.12,6.43 0.24,6.07 1.85,6.07 2.09,5.83 2.09,3.3 1,2.21 1,1.52 1.44,1.08 4.05,1.08 4.52,0.61 4.52,-0.13 4.27,-0.38 2.18,-0.38 1.64,-0.92 v2(1.64,-1.41)
  In8.Cu w0.08: v1(-17.51,36.58) -16.86,37.23 v1(-12.55,37.23) ; v2(-0.95,39.12) -0.95,39.08 -0.6,38.73 -0.06,38.19 -0.06,37.9 -0.06,37.07 0.62,36.39 -0.02,37.03 3.21,33.8 3.21,30.41 3.55,30.07 4.1,29.52 4.1,28.09 4.1,29.25 4.1,24.2 4.3,24 4.3,23.48 4.3,23.3 4.13,23.13 3.88,22.88 3.88,22.46 3.88,22.06 3.96,21.98 3.98,21.96 3.98,17.85 4.36,17.47 v1(5.28,17.47)
  B.Cu w0.08: U51.K8@-17.67,36.65 -17.6,36.58 v1(-17.51,36.58) ; v1(-12.55,37.23) -12.4,37.23 -11.98,36.81 -11.98,36.73 -11.985,36.725 -11.985,36.315 -11.74,36.07 -6.48,36.07 -6.18,36.37 -6.18,38.38 -4.99,39.57 -3.56,39.57 -3.45,39.46 -2.64,39.46 -2.58,39.52 -1.35,39.52 v2(-0.95,39.12) ; U76.L2@0.86,-9.12 0.56,-9.12 0.26,-8.82 0.26,-7.42 0.12,-7.28 0.12,-6.37 1.05,-5.44 1.05,-4.4 1.39,-4.06 2.6,-4.06 2.75,-3.91 2.75,-1.97 2.53,-1.75 1.98,-1.75 v2(1.64,-1.41) ; v1(5.28,17.47) 5.29,17.48 5.805,17.48 U61.R4@5.895,17.57
CPU_A16: U21.25 U51.N10 U61.N5 U76.L1 | length 293.4
  F.Cu w0.08: U21.25@-16.18,-5.49 -14.32,-5.49 v3(-14.25,-5.42) ; v3(-11.87,-6.44) -10.59,-6.44 -9.69,-7.34 -5.47,-7.34 -5.33,-7.2 v3(-4.75,-7.2) ; v3(-3.34,-7.45) -1.66,-7.45 -1.33,-7.12 v2(-0.84,-7.12)
  In1.Cu w0.08: v3(-14.25,-5.42) -12.42,-5.42 -11.87,-5.97 v3(-11.87,-6.44) ; v3(-4.75,-7.2) -4.5,-7.45 v3(-3.34,-7.45)
  In5.Cu w0.08: v2(-46.75,30.59) -47.64,30.59 -49.32,32.27 -49.32,43.35 -46.02,46.65 -46.02,48.49 -43.03,51.48 -38,51.48 -37.66,51.82 -34.17,51.82 -33.59,51.24 -11.57,51.24 -9.27,48.94 -9.27,47.69 -5.81,44.23 -4.47,44.23 -1.6,41.36 v2(-1.6,41.31) ; v2(-45.96,-33.2) -37.8,-33.2 -31.37,-39.63 -27.29,-39.63 -27.03,-39.89 -26.99,-39.89 -26.95,-39.93 -21.95,-39.93 -21.71,-40.17 -0.77,-40.17 -0.2,-39.6 v2(-0.2,-39.16)
  In6.Cu w0.08: v2(-46.75,30.59) -46.01,29.85 -46.01,28.57 -46.76,27.82 -46.76,13.33 -44.52,11.09 -44.52,3.44 -47.58,0.38 -47.58,-7.66 -45.08,-10.16 -45.08,-13.93 -44.45,-14.56 -44.45,-23.31 -44.94,-23.8 -45.64,-23.8 -46.09,-24.25 -46.09,-30.02 -46.08,-30.03 -46.08,-30.08 -45.96,-30.2 v2(-45.96,-33.2) ; v2(-2.58,24.66) -1.86,25.38 -1.86,30.69 -1.3,31.25 -1.3,32.36 -0.13,33.53 -0.13,38.14 -0.48,38.49 -0.48,39.3 -1.6,40.42 v2(-1.6,41.31) ; v2(-0.84,-7.12) -0.3,-7.66 -0.3,-39.06 v2(-0.2,-39.16)
  In8.Cu w0.08: v1(-6.24,33.03) -6.24,31.86 -4.65,30.27 -4.65,28.24 -3.96,27.55 -3.96,26.59 -2.59,25.22 -2.59,24.67 v2(-2.58,24.66) ; v2(-0.84,-7.12) -0.85,-7.13 -0.85,-7.79 -0.22,-8.42 v1(0.8,-8.42) ; v1(-0.27,24.28) -0.27,24 -0.39,23.88 -0.39,22.91 -0.02,22.54 -0.02,21.84 0.41,21.41 0.86,21.41 1.11,21.16 1.11,19.99 0.88,19.76 0.88,18.7 0.56,18.38 0.56,16.86 1.36,16.06 3.055,16.06 v1(3.375,15.74)
  B.Cu w0.08: U51.N10@-13.86,34.11 -12.03,34.11 -10.97,33.05 -6.26,33.05 v1(-6.24,33.03) ; v2(-2.58,24.66) -2.57,24.65 -1.19,24.65 -0.82,24.28 v1(-0.27,24.28) ; v1(0.8,-8.42) 0.86,-8.36 U76.L1@0.86,-7.85 ; v1(3.375,15.74) U61.N5@3.375,16.275
CPU_A17: U21.26 U51.L9 U61.P4 U76.M2 | length 83.1
  F.Cu w0.08: U21.26@-16.18,-5.99 -14.13,-5.99 -13.88,-5.74 -9.39,-5.74 v3(-9.38,-5.75) ; v3(-8.65,-5.77) -7.37,-5.77 -6.57,-6.57 -3.3,-6.57 v2(-3.29,-6.56) ; v3(-5.44,19.12) -5.05,18.73 -5.05,17.74 v3(-4.55,17.24) ; v3(-1.82,17.75) -1.77,17.7 1.01,17.7 1.18,17.53 3.03,17.53 v2(3.72,16.84)
  In1.Cu w0.08: v2(-9.42,31.92) -8.91,31.92 -7.71,30.72 -7.71,23.51 -7.3,23.1 -7.3,19.79 -6.63,19.12 v3(-5.44,19.12) ; v3(-9.38,-5.75) -9.36,-5.77 v3(-8.65,-5.77) ; v2(-3.29,-6.56) -3.29,-5.99 -3.69,-5.59 -4.19,-5.59 -4.46,-5.32 -4.46,-3.62 -4.89,-3.19 -4.89,-0.14 -5.34,0.31 -5.34,8.4 -4.55,9.19 v3(-4.55,17.24) -2.33,17.24 v3(-1.82,17.75)
  In8.Cu w0.08: v1(-16.4,34.72) -16.36,34.68 -13.39,34.68 -12.18,33.47 -12.18,32.94 -11.16,31.92 v2(-9.42,31.92) ; v2(-3.29,-6.56) -2.17,-6.56 -1.97,-6.76 -1.97,-8.67 -1.28,-9.36 1.02,-9.36 1.2,-9.18 v1(1.95,-9.18)
  B.Cu w0.08: v1(-16.4,34.72) U51.L9@-16.4,35.38 ; v2(3.72,16.84) 3.9,16.84 4.625,17.565 U61.P4@4.625,17.57
CPU_A18: U21.27 U51.M10 U61.T3 U76.N1 | length 110.2
  F.Cu w0.08: U21.27@-16.18,-6.49 -13.88,-6.49 -13.64,-6.25 v2(-13.21,-6.25)
  In8.Cu w0.08: v1(-14.49,34.06) -13.24,34.06 -12.48,33.3 -12.48,33 v1(-10.96,31.48) ; v1(-8.5,-6.42) -8.5,-4.64 -8.35,-4.49 -7.3,-4.49 -7.13,-4.32 -6.23,-4.32 -6.09,-4.46 v1(-5.78,-4.46) ; v1(-4.73,-5.46) -4.43,-5.46 -4.29,-5.6 -3.51,-5.6 -2.81,-6.3 v1(-2.06,-6.3) -1.79,-6.57 -1.79,-8.55 -1.18,-9.16 0.95,-9.16 1.65,-8.46 v1(3.42,-8.46) ; v1(-2.09,-2.52) -2.09,-1.27 -1.75,-0.93 -1.75,-0.41 -1.82,-0.34 v1(-1.82,0.05) ; v1(1.511,-0.327) 1.763,-0.327 1.95,-0.14 v1(1.95,1.01) ; v1(6.2,28.35) 6.19,28.36 7.8,28.36 8.5,27.66 v1(8.5,25.02) ; v1(8.29,13.89) 9.96,13.89 10.55,14.48 10.55,14.75 10.45,14.85 v1(10.45,15.12) ; v1(8.87,20.37) 8.89,20.35 v1(8.89,18.56)
  B.Cu w0.08: U51.M10@-15.13,34.11 -14.54,34.11 v1(-14.49,34.06) ; v2(-13.21,-6.25) -9.08,-6.25 -8.91,-6.42 v1(-8.5,-6.42) ; v1(-10.96,31.48) -10.4,30.92 -8.97,30.92 -8.71,30.66 -8.15,30.66 -8.09,30.6 0.58,30.6 0.91,30.27 1.98,30.27 2.63,29.62 3.45,29.62 3.77,29.3 3.77,28.26 4.3,27.73 5.98,27.73 6.2,27.95 v1(6.2,28.35) ; v1(-5.78,-4.46) -4.78,-5.46 v1(-4.73,-5.46) ; v1(-2.09,-2.52) -1.83,-2.78 -1.83,-3.44 -1.89,-3.5 -1.89,-4.7 -2.01,-4.82 -2.01,-6.25 v1(-2.06,-6.3) ; v1(-1.82,0.05) -1.57,0.3 -0.99,0.3 -0.68,-0.01 1.194,-0.01 v1(1.511,-0.327) ; v1(1.95,1.01) 2.33,1.39 6.39,1.39 6.98,0.8 7.67,0.8 8.84,1.97 8.84,3.11 9.19,3.46 9.19,11.8 8.02,12.97 8.02,13.68 8.23,13.89 v1(8.29,13.89) ; U76.N1@3.4,-7.85 3.4,-8.44 v1(3.42,-8.46) ; U61.T3@7.18,18.81 8.16,18.81 8.41,18.56 v1(8.89,18.56) ; v1(8.5,25.02) 9.26,24.26 10.14,24.26 10.97,23.43 10.97,20.73 10.93,20.69 10.77,20.69 ; v1(8.87,20.37) 9.19,20.69 10.77,20.69 ; v1(10.45,15.12) 10.45,15.17 9.8,15.82 9.8,17.78 10.21,18.19 10.55,18.19 10.77,18.41 10.77,20.69
CPU_A19: U21.29 U51.N13 U61.R3 U76.P2 | length 86.5
  F.Cu w0.08: U21.29@-16.18,-7.49 -14.14,-7.49 v3(-14.07,-7.42) ; v3(-13.02,-7.72) -5.83,-7.72 -5.75,-7.8 0.01,-7.8 0.22,-7.59 v3(1.35,-7.59)
  In1.Cu w0.08: v3(-14.07,-7.42) -13.78,-7.42 -13.48,-7.72 v3(-13.02,-7.72) ; v3(1.35,-7.59) 4.03,-7.59 4.34,-7.28 4.34,-5.38 v2(3.74,-4.78)
  In5.Cu w0.08: v2(-14.37,25.59) -14.27,25.59 -12.9,24.22 -8.2,24.22 -7.79,23.81 -7.75,23.81 -7.29,23.35 -7.29,22.07 -6.51,21.29 3.07,21.29 4.68,19.68 4.68,18.88 4.99,18.57 v2(4.99,18.09)
  In6.Cu w0.08: v2(3.74,-4.78) 4.25,-4.78 5.21,-3.82 5.21,9.83 4.84,10.2 4.84,12.6 5.01,12.77 5.01,18.07 v2(4.99,18.09)
  In8.Cu w0.08: v2(-14.37,25.59) -13.85,26.11 v1(-13.85,28.8) ; v1(2.75,-7.58) 2.89,-7.44 4.04,-7.44 4.29,-7.19 4.29,-5.33 v2(3.74,-4.78) ; v1(2.81,-9.28) 4.24,-9.28 v1(4.67,-9.71)
  B.Cu w0.08: U51.N13@-13.86,30.3 -13.86,28.81 v1(-13.85,28.8) ; v1(2.75,-7.58) 2.75,-9.22 v1(2.81,-9.28) ; v1(4.67,-9.71) U76.P2@4.67,-9.12 ; v2(4.99,18.09) 5.14,18.09 5.89,18.84 U61.R3@5.895,18.84
CPU_A20: U21.30 U51.M12 U61.P3 U76.P1 | length 205.5
  F.Cu w0.08: U21.30@-16.18,-7.99 -14.11,-7.99 -13.57,-7.45 -13.57,-7.05 -13.29,-6.77 -10.88,-6.77 -10.12,-7.53 -3.83,-7.53 -3.46,-7.16 -2.33,-7.16 -1.77,-6.6 v2(-1.37,-6.6)
  In4.Cu w0.08: v2(-5.15,37.9) -5.15,36.96 -3.59,35.4 -3.59,29.71 -1.92,28.04 0.8,28.04 4.42,24.42 4.88,24.42 6.34,22.96 v2(6.34,22.43)
  In5.Cu w0.08: v2(-48.78,14.93) -48.78,14.89 -49.97,13.7 -49.97,13.2 -37.7,0.93 -30.36,0.93 -25.54,-3.89 -19.59,-3.89 -18.98,-3.28 -16.53,-3.28 -15.07,-1.82 -11.87,-1.82 -9.4,-4.29 -6.52,-4.29 -5.2,-5.61 -3.04,-5.61 -2.05,-6.6 v2(-1.37,-6.6) ; v2(-43.71,37.89) -43.64,37.96 -37.94,37.96 -36.05,39.85 -34.82,39.85 -34.52,39.55 -34.52,39.18 -33.27,37.93 -22.24,37.93 -21.03,39.14 -20.32,39.14 -18.17,36.99 -13.17,36.99 -11.91,35.73 -7.32,35.73 v2(-5.15,37.9)
  In8.Cu w0.08: v2(-48.78,14.93) -48.77,14.93 -47.56,16.14 -47.56,17.64 -46.05,19.15 -46.05,28.29 -47.19,29.43 -47.19,32.62 -47,32.81 -47,34.22 -47.42,34.64 -47.42,37.55 -46.82,38.15 -43.97,38.15 v2(-43.71,37.89) ; v1(-15.15,32.16) -15.15,31.58 -14.76,31.19 v1(-12.23,31.19) ; v1(-12.24,30.56) -10.77,29.09 v1(-9.47,29.09) ; v1(-7.43,29.61) -7.45,29.63 -7.45,36.49 -7.11,36.83 -6.21,36.83 -5.15,37.89 v2(-5.15,37.9) ; v2(-1.37,-6.6) -1.37,-7.72 -0.27,-8.82 0.94,-8.82 1.62,-8.14 4.38,-8.14 v1(4.68,-8.44) ; v1(4.74,22.1) 6.01,22.1 v2(6.34,22.43)
  B.Cu w0.08: v1(-15.15,32.16) -15.13,32.14 U51.M12@-15.13,31.57 ; v1(-12.24,30.56) -12.24,31.18 v1(-12.23,31.19) ; v1(-9.47,29.09) -8.95,29.61 v1(-7.43,29.61) ; U61.P3@4.625,18.84 4.06,19.405 4.06,21.76 4.4,22.1 v1(4.74,22.1) ; U76.P1@4.67,-7.85 4.67,-8.43 v1(4.68,-8.44)
CPU_A20M#: J9.7 U61.H3 U76.B13 | length 65.4
  In1.Cu w0.08: v3(-16.795,-23.14) -16.47,-23.14 -15.49,-22.16 -10.94,-22.16 -10.57,-22.53 v2(-10.19,-22.53)
  In4.Cu w0.08: v2(-10.19,-22.53) -9.44,-21.78 -9.44,-19.75 -9.075,-19.385 -9.075,-10.16 -9.12,-10.115 -9.12,-9.345 -9.075,-9.3 -9.075,-5.595 -8.37,-4.89 -8.37,7.6 -8.14,7.83 -8.14,7.87 -7.84,8.17 -4.57,8.17 -3.85,8.89 -3.85,21.51 v2(-2.4,22.96)
  In8.Cu w0.08: v1(-3,18.21) -2.67,18.54 -2.28,18.54 -1.48,19.34 -1.48,21.64 -1.76,21.92 -2.16,21.92 -2.4,22.16 v2(-2.4,22.96)
  B.Cu w0.08: v1(-3,18.21) -2.995,18.215 U61.H3@-2.995,18.84
  B.Cu w0.4: U76.B13@-10.57,-23.09 -10.57,-22.91 v2(-10.19,-22.53)
CPU_A21: U21.31 U51.K11 U61.T2 U76.T3 | length 103.4
  F.Cu w0.08: U21.31@-16.18,-8.49 -16.15,-8.46 v3(-13.68,-8.46) ; v3(-12.51,-8.46) -11.98,-7.93 -8.35,-7.93 -8.3,-7.98 0.48,-7.98 0.54,-7.92 1.5,-7.92 1.65,-7.77 v2(1.65,-6.62)
  In1.Cu w0.08: v3(-13.68,-8.46) v3(-12.51,-8.46)
  In8.Cu w0.08: v1(-17.55,32.71) -17.39,32.55 -17.39,31.41 -16.51,30.53 -13.11,30.53 -12.89,30.31 v1(-12.89,28.78) ; v1(-11.31,28.26) -11.27,28.22 v1(-9.56,28.22) ; v1(2.83,27.89) 2.83,27.4 2.96,27.27 v1(2.96,24.49) ; v1(5.07,24.52) 6.31,23.28 7.39,23.28 8.06,22.61 v1(8.06,22.43) ; v1(7.43,-10.45) 7.74,-10.14 8.08,-10.14 8.18,-10.24 8.63,-10.24 8.83,-10.04 8.83,-9.63 8.51,-9.31 8.51,-7.18 8.77,-6.92 v1(8.77,-6.46) 8.77,-6.02 8.86,-5.93 8.86,-2.8 8.74,-2.68 v1(8.39,-2.68) ; v1(9.94,7.83) 9.91,7.83 9,8.74 9,9.4 v1(10.18,10.58)
  B.Cu w0.08: U51.K11@-17.67,32.84 -17.55,32.72 v1(-17.55,32.71) ; v1(-12.89,28.78) -11.83,28.78 v1(-11.31,28.26) ; v1(-9.56,28.22) -8.73,28.22 -8.31,27.8 -7.26,27.8 -5.5,29.56 -3.93,29.56 -2.58,28.21 2.51,28.21 v1(2.83,27.89) ; v2(1.65,-6.62) 2.55,-6.62 3.81,-5.36 7.27,-5.36 8.37,-6.46 v1(8.77,-6.46) ; v1(2.96,24.49) 5.04,24.49 v1(5.07,24.52) ; U61.T2@7.165,20.11 7.17,20.11 8.06,21 v1(8.06,22.43) ; U61.T2@7.18,20.08 7.92,19.34 9.18,19.34 9.42,19.1 9.42,14.26 9.58,14.1 9.58,12.42 10.18,11.82 v1(10.18,10.58) ; v1(8.39,-2.68) 8.39,-2.25 8.19,-2.05 8.19,-1.72 8.48,-1.43 8.94,-1.43 9.07,-1.3 10.16,-1.3 10.43,-1.03 10.43,-0.55 10.21,-0.33 10.21,0.5 10.67,0.96 10.67,4.08 11.14,4.55 11.14,4.98 9.94,6.18 v1(9.94,7.83)
CPU_A22: U21.32 U51.M13 U61.R1 U76.R3 | length 149.6
  F.Cu w0.08: v3(-18.54,-19.99) -17.79,-19.99 -17.28,-20.5 -17.28,-23.49 -16.73,-24.04 v3(-16.25,-24.04) ; v3(-17.75,-10) -17.82,-10 -18.36,-9.46 -18.36,-9.11 -18.07,-8.82 -17.73,-8.82 -17.62,-8.93 -16.24,-8.93 U21.32@-16.18,-8.99
  In1.Cu w0.08: v3(-18.54,-19.99) -18.17,-19.99 -17.99,-19.81 -17.92,-19.74 -17.92,-19.65 -17.92,-14.29 -17.73,-14.1 -17.36,-13.73 -17.36,-13.51 -17.36,-10.39 v3@-17.74,-10.01 ; v3(-16.25,-24.04) -15.52,-24.04 -15.06,-24.5 -15.06,-25.91 -11.9,-29.07 -10.63,-29.07 -10.15,-28.59 v2(-10.15,-27.76)
  In8.Cu w0.08: v1(-14.5,30.23) v1(-13.23,30.23) ; v1(-11.17,30.63) -9.94,30.63 -9.35,31.22 v1(-9.35,31.24) ; v2(-10.15,-27.76) -9.82,-27.43 -8.98,-27.43 -8.49,-27.92 v1(-6.43,-27.92) ; v1(3.6,30.52) 4.28,29.84 4.28,24.32 4.51,24.09 4.51,23.03 5.12,22.42 5.64,22.42 6.09,22.87 6.77,22.87 ; v1(5.58,-10.01) 5.58,-4.24 5.64,-4.18 v1(5.64,-1.08) ; v1(5.89,21.46) 6.11,21.46 6.77,22.12 6.77,22.87 ; v1(7.46,-22.53) 7.46,-20.56 v1(7.81,-20.21) ; v1(9.1,-0.84) 9.74,-0.84 10.04,-0.54 10.04,0.06 9.25,0.85 9.25,1.27 v1(9.95,1.97) ; v1(9.73,8.79) 10.08,9.14 12.47,9.14 13.14,9.81 13.14,11.23 12.6,11.77 v1(12.6,14.9) ; v1(10.75,15.78) 10.75,16.16 10.88,16.29 10.88,17.78 10.44,18.22 10.44,21.85 10.12,22.17 9.08,22.17 8.77,21.86 7.72,21.86 7.56,22.02 7.56,22.2 6.89,22.87 6.77,22.87
  B.Cu w0.08: U51.M13@-15.13,30.3 -14.57,30.3 v1(-14.5,30.23) ; v1(-13.23,30.23) -12.9,29.9 -11.9,29.9 v1(-11.17,30.63) ; v1(-9.35,31.24) -8.78,31.24 -8.38,30.84 -7.97,30.84 -7.91,30.78 0.68,30.78 0.94,30.52 v1(3.6,30.52) ; v1(-6.43,-27.92) -6.39,-27.96 -6.39,-28.44 -5.92,-28.91 8.21,-28.91 8.75,-28.37 8.75,-27.37 8.45,-27.07 8.45,-24.71 8.23,-24.49 8.23,-22.64 8.12,-22.53 v1(7.46,-22.53) ; v1(5.58,-10.01) 5.58,-10.03 U76.R3@5.94,-10.39 6.59,-11.04 6.59,-11.94 6.95,-12.3 7.57,-12.3 7.81,-12.54 v1(7.81,-20.21) ; v1(5.64,-1.08) 8.48,-1.08 8.72,-0.84 v1(9.1,-0.84) ; v1(5.89,21.46) 5.89,21.385 U61.R1@5.895,21.38 ; v1(9.73,8.79) 9.73,8.42 9.65,8.34 9.65,4.89 10.45,4.09 10.45,2.47 v1(9.95,1.97) ; v1(10.75,15.78) 11.63,14.9 v1(12.6,14.9)
CPU_A23: U21.33 U51.L12 U61.N4 U76.P3 | length 117.8
  F.Cu w0.08: U21.33@-16.18,-9.49 -13.76,-9.49 v3(-13.68,-9.41) ; v3(-11.89,-9.44) -9.32,-9.44 -8.95,-9.07 -6.44,-9.07 -6.4,-9.03 v3(-6.35,-9.03) ; v3(-8.24,22.15) -7.3,22.15 -6.54,22.91 -6.09,22.91 -5.97,22.79 -5.41,22.79 -4.77,22.15 -2.61,22.15 -0.44,19.98 1.56,19.98 1.92,19.62 3.12,19.62 3.59,20.09 7.35,20.09 7.52,19.92 v3(8.02,19.92) ; v3(-5.83,1.09) -4.51,1.09 v3(-4.5,1.1) ; v3(-5.65,-2.4) -5.61,-2.36 v3(-4.43,-2.36)
  In1.Cu w0.08: v3(-13.68,-9.41) -13.65,-9.44 v3(-11.89,-9.44) ; v2(-9.55,29.57) -9.54,29.57 -8.28,28.31 -8.28,22.19 v3(-8.24,22.15) -8.24,19.68 -6.73,18.17 -6.73,8.03 -5.78,7.08 -5.78,1.54 -5.83,1.49 v3(-5.83,1.09) ; v3(-6.35,-9.03) -6.37,-9.01 -6.37,-7.03 -5.75,-6.41 -5.75,-2.76 -5.65,-2.66 v3(-5.65,-2.4) ; v3(-4.5,1.1) -4.5,0.75 -3.99,0.24 -3.99,-0.26 -4.25,-0.52 -4.48,-0.52 -4.68,-0.72 -4.68,-2.11 v3(-4.43,-2.36) -4.43,-3.21 -3.99,-3.65 -3.99,-4.43 -2.6,-5.82 -2.6,-6.7 -2.89,-6.99 v2(-4.17,-6.99) ; v3(8.02,19.92) 8.02,18.56 7.93,18.47 7.93,13.61 v2(8.64,12.9)
  In8.Cu w0.08: v1(-15.77,31.51) -15.21,30.95 -12.85,30.95 -12.78,30.88 -12,30.88 -10.69,29.57 v2(-9.55,29.57) ; v1(-4.85,-9.28) -4.84,-9.27 -2.06,-9.27 -1.6,-9.73 -1.6,-11.24 -1.23,-11.61 1.75,-11.61 1.97,-11.39 1.97,-11.15 2.85,-10.27 v1(4.04,-10.27) ; v1(3.56,17.41) 3.76,17.41 4.99,16.18 8.59,16.18 v1(8.7,16.07)
  B.Cu w0.08: U51.L12@-16.4,31.57 -15.83,31.57 v1(-15.77,31.51) ; v1(-4.85,-9.28) -4.85,-8.84 -4.95,-8.74 -4.95,-8.19 -4.83,-8.07 -4.83,-7.65 v2(-4.17,-6.99) ; U61.N4@3.355,17.57 3.515,17.41 v1(3.56,17.41) ; v1(4.04,-10.27) 4.07,-10.24 4.52,-10.24 U76.P3@4.67,-10.39 ; v2(8.64,12.9) 8.64,13.94 8.7,14 v1(8.7,16.07)
CPU_A24: U21.34 U61.P2 U76.T4 | length 76.5
  F.Cu w0.08: U21.34@-16.18,-9.99 -16.14,-9.95 v2(-13.83,-9.95)
  In8.Cu w0.08: v1(-2.69,-5.96) -1.91,-5.96 -1.66,-6.21 -0.13,-6.21 v1(0.53,-6.87) ; v1(4.82,19.99) 5.11,19.7 7.79,19.7 v1(8.52,18.97) ; v1(8.2,-11.88) 7.96,-11.64 7.96,-11.13 8.44,-10.65 8.71,-10.65 9.15,-10.21 9.15,-7.17 9.34,-6.98 9.34,-2.23 9.86,-1.71 v1(10.85,-1.71)
  B.Cu w0.08: v2(-13.83,-9.95) -13.83,-5.65 -13.59,-5.41 -12.91,-5.41 -12.77,-5.55 -12.17,-5.55 -11.82,-5.9 -8.26,-5.9 -8.08,-5.72 -7.32,-5.72 -7.18,-5.86 -6.87,-5.86 -6.59,-6.14 -4.99,-6.14 -4.58,-5.73 -2.92,-5.73 v1(-2.69,-5.96) ; v1(0.53,-6.87) 0.6,-6.87 0.94,-7.21 2.81,-7.21 3.49,-6.53 4.76,-6.53 5.32,-7.09 5.32,-8.25 5.59,-8.52 7.8,-8.52 8.82,-9.54 8.82,-10.3 7.9,-11.22 7.65,-11.22 U76.T4@7.21,-11.66 7.98,-11.66 v1(8.2,-11.88) ; v1(8.52,18.97) 9.04,18.97 9.23,18.78 9.23,14.2 9.4,14.03 9.4,12.31 9.76,11.95 9.76,9.32 10.27,8.81 10.27,6.35 11.6,5.02 11.73,5.02 11.97,4.78 11.97,4.35 10.85,3.23 10.85,0.79 10.46,0.4 10.46,-0.24 10.85,-0.63 v1(10.85,-1.71)
CPU_A25: U21.35 U61.P1 U76.R4 | length 82.3
  F.Cu w0.08: U21.35@-16.18,-10.49 -13.68,-10.49 -13.37,-10.18 -13.37,-7.56 -13.01,-7.2 v2(-12.7,-7.2)
  In4.Cu w0.08: v2(-12.7,-7.2) -12.7,-5.28 -13.61,-4.37 -13.61,-1.94 -11.97,-0.3 -11.97,0.13 -11.33,0.77 -11.33,2.29 -11.72,2.68 -11.72,3.2 -11.16,3.76 -11.16,12.03 -9.76,13.43 -5.89,13.43 -5.5,13.82 -5.5,21.66 -5.14,22.02 -5.14,23.01 -5.33,23.2 -5.33,24.5 -4.33,25.5 0.53,25.5 2.33,23.7 v2(2.33,22.75)
  In8.Cu w0.08: v2(-12.7,-7.2) -12.69,-7.2 -12.68,-7.19 -12.18,-7.19 -11.68,-7.69 -11.68,-12.36 -11.11,-12.93 -9.71,-12.93 -9.67,-12.89 3.62,-12.89 4.55,-11.96 4.87,-11.96 4.96,-11.87 5.96,-11.87 v1(5.97,-11.86) ; v1(4.25,22.75) 4.25,21.84 v1(4.62,21.47)
  B.Cu w0.08: v2(2.33,22.75) v1(4.25,22.75) ; v1(4.62,21.47) 4.62,21.385 U61.P1@4.625,21.38 ; U76.R4@5.94,-11.66 5.97,-11.69 v1(5.97,-11.86)
CPU_A31: J12.6 U61.N3 U76.R6 | length 56.9
  In8.Cu w0.08: v1(4.32,18.11) 4.32,20.45 4.71,20.84 6.03,20.84 6.34,21.15 8.41,21.15 9.21,21.95 10.08,21.95 10.23,21.8 10.23,18.06 10.7,17.59 10.7,16.63 v1(10.35,16.28) ; v1(6.89,-13.54) 6.78,-13.43 6.78,-9.49 7.75,-8.52 7.75,-6.7 7.31,-6.26 7.31,-3.98 7.6,-3.69 7.92,-3.69 8.09,-3.52 8.09,-2.99 7.92,-2.82 7.56,-2.82 7.15,-2.41 7.15,-0.06 7.34,0.13 7.34,0.69 6.61,1.42 6.61,3.22 6.9,3.51 7.87,3.51 8.51,4.15 10.01,4.15 10.45,3.71 v1(11.8,3.71) ; v1(11.93,9.66) 12.27,10 v1(12.27,15.31)
  B.Cu w0.08: U61.N3@3.355,18.84 4.085,18.11 v1(4.32,18.11) ; U76.R6@5.94,-14.2 6.34,-13.8 6.63,-13.8 v1(6.89,-13.54) ; v1(10.35,16.28) 10.84,16.28 11.81,15.31 v1(12.27,15.31) ; v1(11.8,3.71) 11.84,3.71 12.23,4.1 12.23,5.36 11.25,6.34 11.25,8.66 11.93,9.34 v1(11.93,9.66)
CPU_ADS#: U21.49 U51.K12 U61.N2 U76.B3 | length 93.6
  F.Cu w0.08: v2(-12.85,25.77) -11.99,25.77 -11.77,25.55 -10.82,25.55 -10.4,25.13 v3(-9.86,25.13)
  In1.Cu w0.08: v3(-9.86,25.13) -9.85,25.12 -9.85,22.92 -9.44,22.51 -9.44,17.53 -7.13,15.22 -7.13,7.7 -8.76,6.07 -8.76,4.74 -7.96,3.94 -7.96,-0.53 -7.52,-0.97 -6.86,-0.97 -6.62,-1.21 -6.62,-1.76 -6.99,-2.13 v2(-6.99,-5.33) -7.36,-5.33 -8.01,-5.98 -8.01,-12.43 -8.18,-12.6 v3(-8.18,-12.94)
  In5.Cu w0.08: v2(-12.85,25.77) -11.5,24.42 -7.91,24.42 -7.09,23.6 -7.09,22.58 -6.24,21.73 0.95,21.73 1.45,22.23 v2(1.45,22.62)
  In8.Cu w0.08: v1(-17,29.64) -17.59,30.23 -17.59,32.3 -17.75,32.46 -18.03,32.46 -18.19,32.3 -18.19,28.84 -17.53,28.18 -16.37,28.18 -15.4,27.21 -15.4,25.06 -14.78,24.44 -13.03,24.44 -12.85,24.62 v2(-12.85,25.77) ; v1(-9.57,-9.78) -9.11,-9.32 -8.53,-9.32 -8.29,-9.56 -7.89,-9.56 -7.14,-8.81 -7.14,-6.42 -7,-6.28 -7,-6.23 -6.99,-6.22 v2(-6.99,-5.33) ; v2(1.45,22.62) 1.89,22.62 2.92,21.59 2.92,21.13 3.07,20.98 3.07,20.37 v1(2.69,19.99)
  B.Cu w0.08: U51.K12@-17.67,31.57 -17,30.9 v1(-17,29.64) ; U76.B3@-10.57,-10.39 -10.18,-10.39 v1(-9.57,-9.78) ; v1(2.69,19.99) 2.78,20.08 U61.N2@3.37,20.08
CPU_AHOLD: J12.5 U61.L5 U76.A8 | length 63.5
  In8.Cu w0.08: v1(-10.46,-11.04) -10.46,-11.69 -10.2,-11.95 -6.2,-11.95 -5.67,-11.42 -5.67,-8.91 -5.8,-8.78 -5.8,-5.25 -5.52,-4.97 -4.8,-4.97 -4.61,-4.78 -2.99,-4.78 v1(-2.38,-5.39) ; v1(-2.14,-3) -1.76,-2.62 -1.76,-1.45 -0.73,-0.42 -0.73,0.72 -0.51,0.94 -0.51,1.98 -0.23,2.26 -0.23,3.59 -0.49,3.85 -0.49,6.34 v1(-1.07,6.92) ; v1(-1.07,7.61) -0.48,8.2 -0.48,11.63 -0.05,12.06 0.56,12.06 0.79,12.29 1.2,12.29 2.3,13.39 4.44,13.39 4.59,13.24 5.45,13.24 5.71,13.5 5.71,14.9 ; v1(0.65,15.72) 1.47,14.9 6.44,14.9 6.61,15.07 9.11,15.07 9.73,15.69 9.73,16.91 v1(10.35,17.53)
  B.Cu w0.08: U76.A8@-11.84,-16.74 -12.4,-16.18 -12.4,-14.38 -13.02,-13.76 -13.02,-12.77 -12.51,-12.26 -11.46,-12.26 -11.19,-11.99 -11.19,-11.26 -10.97,-11.04 v1(-10.46,-11.04) ; v1(-2.38,-5.39) -2.38,-4.87 -2.14,-4.63 v1(-2.14,-3) ; v1(-1.07,6.92) v1(-1.07,7.61) ; v1(0.65,15.72) 0.65,16.09 U61.L5@0.835,16.275
CPU_BE0#: J9.6 U51.M5 U61.L1 U76.B10 | length 95.7
  F.Cu w0.08: J9.6@-18.395,-21.24 -17.93,-21.705 v3(-17.93,-21.95)
  In1.Cu w0.08: v3(-17.93,-21.95) -17.61,-21.95 -17.04,-22.52 -16.58,-22.52 -13.57,-19.51 -11.76,-19.51 v2(-11.25,-20.02)
  In4.Cu w0.08: v2(-11.25,-20.02) -10.07,-20.02 -9.29,-19.24 -9.29,-3.7 -9.375,-3.615 -9.375,-1.785 -9.29,-1.7 -9.29,7.15 -7.94,8.5 -4.63,8.5 -4.24,8.89 -4.24,21.39 -2.91,22.72 -2.91,23.04 -2.56,23.39 v2(-2.56,24.02)
  In8.Cu w0.08: v1(-15.16,40.21) -13.85,40.21 -13.14,39.5 -9.79,39.5 -9.51,39.78 -6.55,39.78 -5.49,38.72 -3.62,38.72 -3.42,38.52 -3.42,35.39 -3.22,35.19 -3.22,34.11 -3.46,33.87 -3.46,32.62 -3.22,32.38 -3.22,28.85 -1.69,27.32 -1.69,25.1 -1.57,24.98 v1(-1.57,24.32) -1.87,24.02 v2(-2.56,24.02) ; v1(-0.92,23.98) -0.92,21.32 -0.45,20.85 v1(0.75,20.85)
  B.Cu w0.08: v1(-15.16,40.21) -15.16,40.43 U51.M5@-15.13,40.46 ; v1(-1.57,24.32) -1.23,23.98 v1(-0.92,23.98) ; v1(0.75,20.85) 0.815,20.915 U61.L1@0.815,21.38
  B.Cu w0.4: v2(-11.25,-20.02) -11.25,-20.01 -10.57,-19.33 U76.B10@-10.57,-19.28